# Altium PCB FASTCHARGE.PcbDoc
Units mm, origin at the board's own origin, x right, y up, seen from the top; angles counter-clockwise.
Board outline 48.26 x 26.04 mm, 2 copper layers (Top Layer, Bottom Layer); 18 components, 11 nets, 49 pads, 1 vias.
Unrouted connection lines stored in the file: 18.
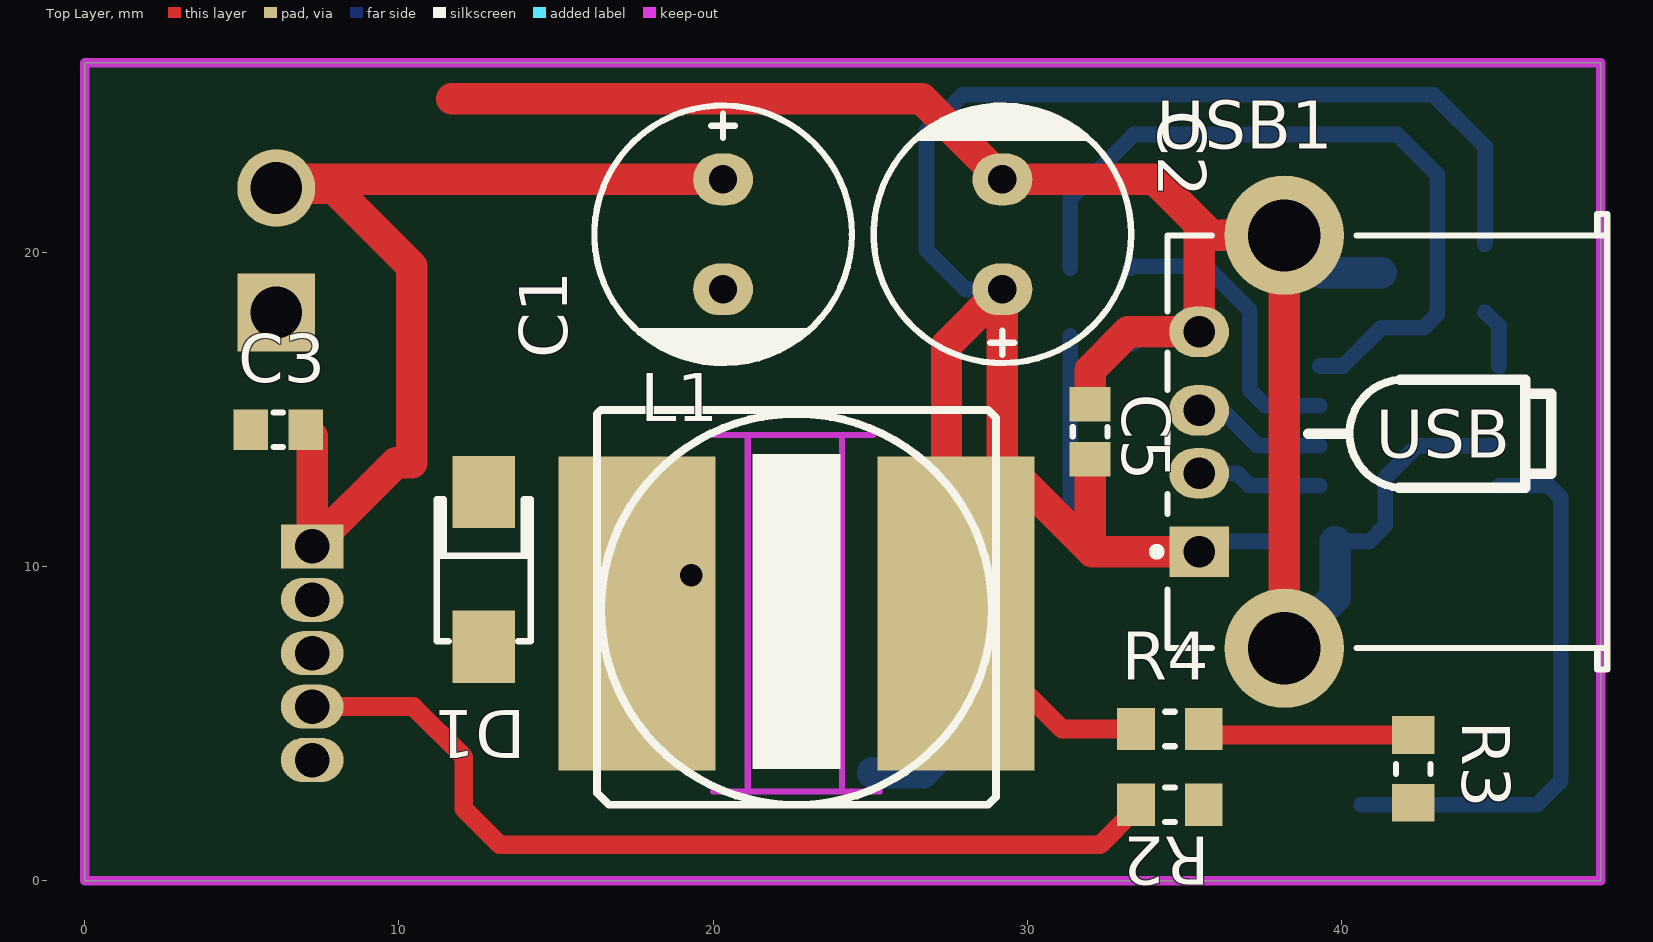
[diagram p0: Top Layer view]
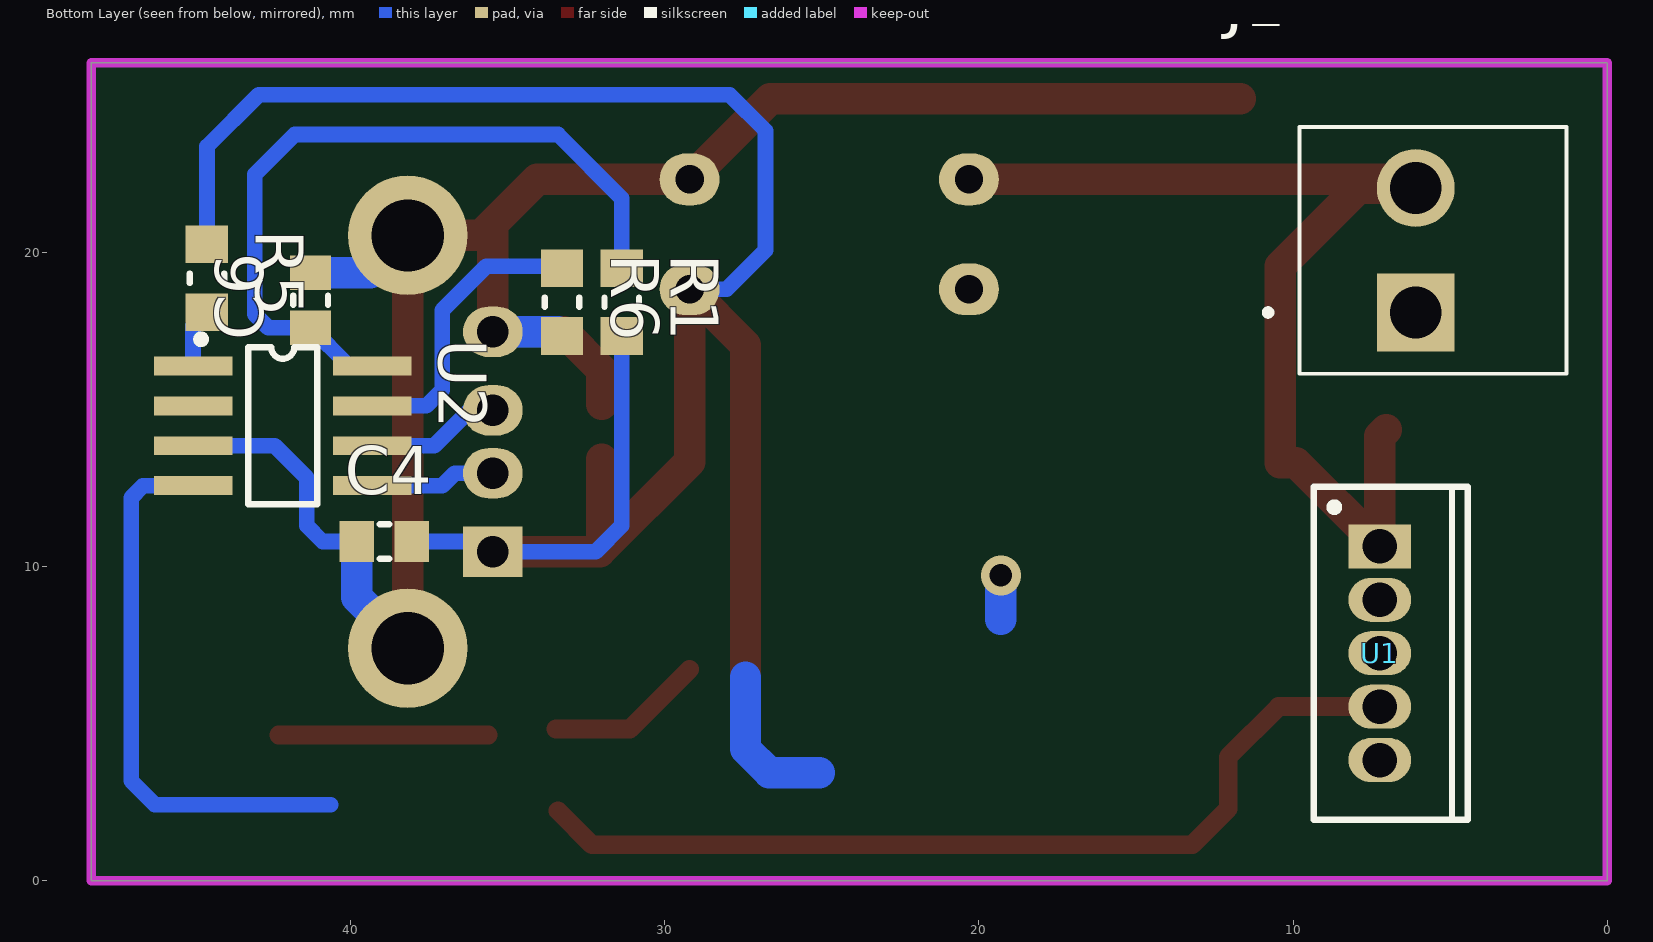
[diagram p1: Bottom Layer view, seen from below]
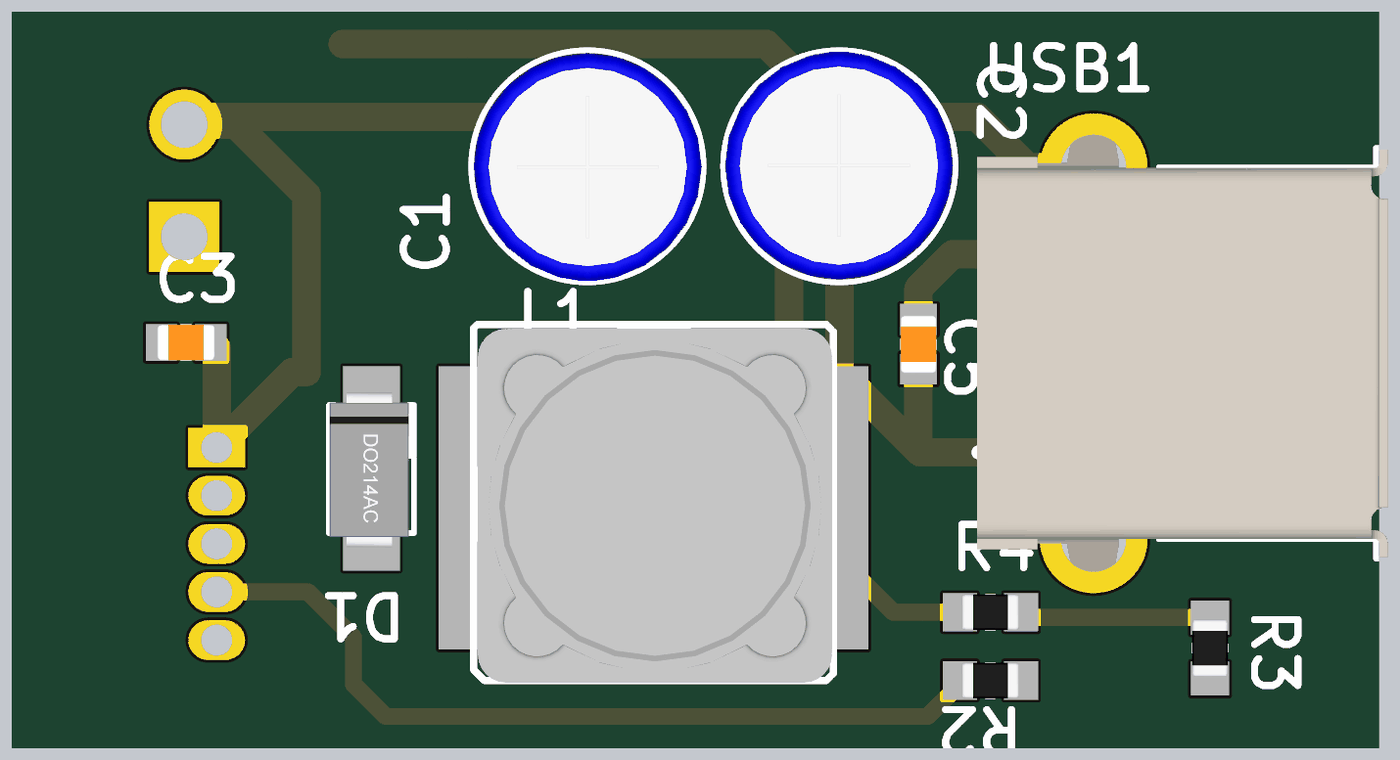
[diagram p2: 3D render of the assembled board from above, using the file's embedded part models]
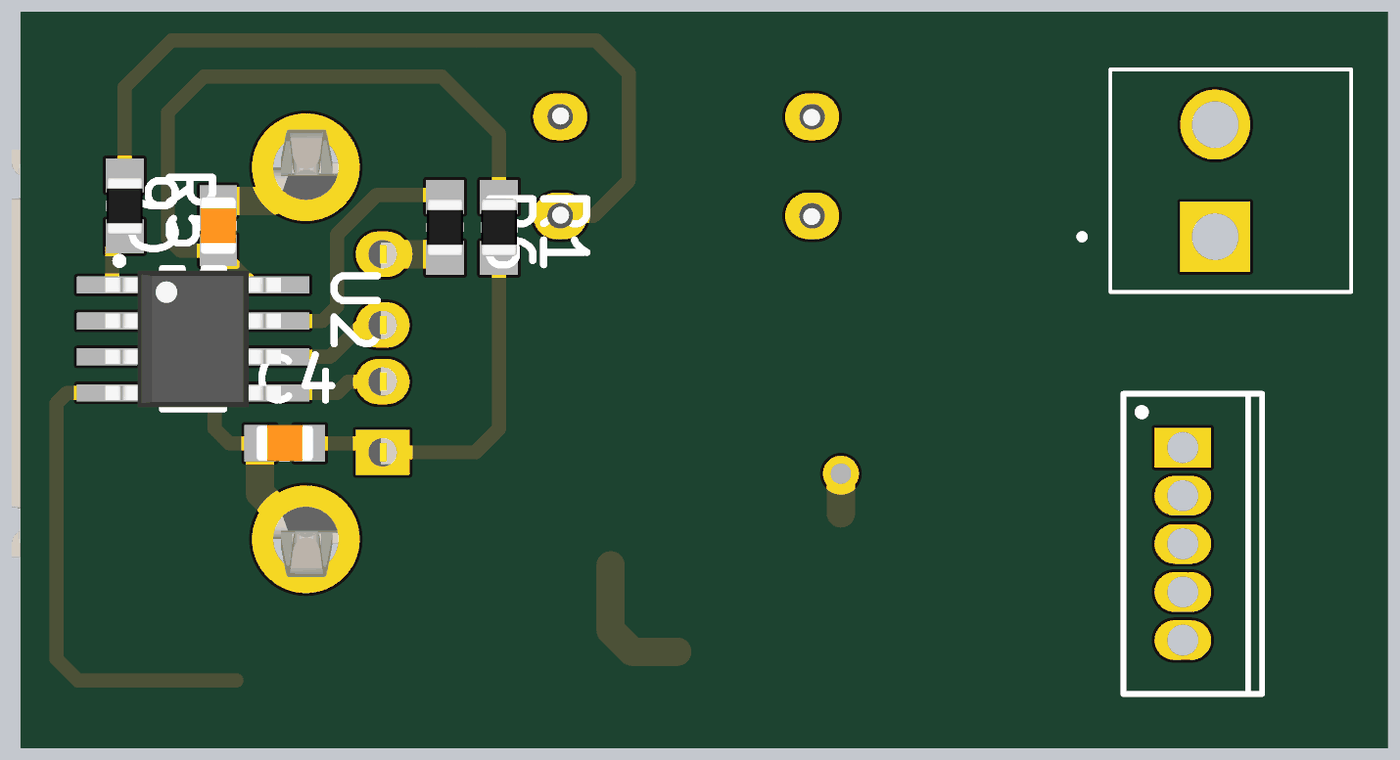
[diagram p3: 3D render of the assembled board from below, using the file's embedded part models]

## Layer stack, top to bottom
Top Solder: solder mask 0.0102, Solder Resist, Dk 3.5
Top Layer: signal copper 0.0356
Dielectric 1: dielectric 0.32, FR-4, Dk 4.8
Bottom Layer: signal copper 0.0356
Bottom Solder: solder mask 0.0102, Solder Resist, Dk 3.5

## Board outline
0,0 48.26,0 48.26,26.035 0,26.035

## Design rules (kind name [scope] priority, off if disabled: settings)
Clearance [All] p1: gap=0.7 ignorepadtopadclearanceinfootprint=FALSE
PlaneConnect [All] p1: planeconnectstyle=Direct reliefexpansion=0.508 reliefentries=4 reliefconductorwidth=0.254 reliefairgap=0.254
PolygonConnect [All] p1: connectstyle=Direct reliefconductorwidth=0.254 reliefentries=4 polygonreliefangle="90 Angle" airgapwidth=0.254
RoomDefinition FastCharge [InComponentClass('FastCharge')] p1: confinementstyle=ConfineIn formatcopy=TRUE lockcomponents=FALSE outline -25.4,-100.965 25.4,-100.965 25.4,-75.565 -25.4,-75.565
RoutingVias [All] p1: holewidth=0.711 width=1.27 viastyle="Through Hole" minholewidth=0.711 minwidth=1.27 maxholewidth=0.711 maxwidth=1.27
SolderMaskExpansion [All] p1: expansion=0.102
Width [All] p1: maxlimit=2.54 minlimit=0.254 preferedwidth=0.508
29 further rules are at their usual default settings.

## Components (designator, comment, footprint, x,y, rotation, side; value= is the part's Value field where it differs from the comment)
C1 "470uF" "Cap 3.5mm" 20.32,20.574 r90 top
C2 "470uF" "Cap 3.5mm" 29.21,20.574 r270 top
C3 "100nF" "SMD 0805" 5.334,14.351 r0 top
C4 "100nF" "SMD 0805" 39.751,10.795 r180 bottom
C5 "100nF" "SMD 0805" 32.004,15.113 r270 top
C6 "100nF" "SMD 0805" 41.275,17.653 r90 bottom
D1 "SS34" "DIODE DO-214AC SMD" 12.7,9.906 r180 top
J1 "6-1123723-2" *TE_6-1123723-2 6.096,20.066 r90 bottom
L1 "33uH" IND_SMD-13.0mm 22.655,8.636 r0 top
R1 "2k2" 0805_1/8W 31.369,18.415 r270 bottom
R2 "33k" 0805_1/8W 34.544,2.413 r0 top
R3 "1k" 0805_1/8W 42.291,3.556 r270 top
R4 "100k" 0805_1/8W 34.544,4.826 r0 top
R5 "2k2" 0805_1/8W 44.577,19.177 r270 bottom
R6 "38k4" 0805_1/8W 33.274,18.415 r270 bottom
U1 "LM2596-ADJ" T05A 7.239,7.239 r270 bottom
U2 "CHY103" "SOIC 8-Lead  (3.8mm)" 42.164,14.478 r180 bottom
USB1 "USB Connector-B Type" USB2.5-2H4C 36.83,13.97 r0 top

## Footprints (in the part's own frame and the unit in brackets; to place one, negate y for a bottom-side part, rotate by r counter-clockwise, add the part's x,y. Pads: shape width x height; smd on the part's side, far side on the other; paste and mask are expansions set on the pad)
0805_1/8W [mm] "Chip Resistor, 2-Leads, Body 2.0x1.3mm, IPC High Density _ (0.100 W)"
  rect 1.2x1.35 smd: 1(-1.079,0) 2(1.079,0)
  silkscreen extent -0.15,-0.55 0.15,0.55, body extent -1.02,-0.64 1.02,0.64, height 0.6
*TE_6-1123723-2 [mm]
  rect 2.475x2.475 hole 1.65: 1(-1.98,0)
  round 2.475 hole 1.65: 2(1.98,0)
  silkscreen extent -3.93,-4.8 3.93,4.8
"Cap 3.5mm" [mm]
  oval 1.651x1.905 hole 0.9: 1(1.75,0) 2(-1.75,0)
  silkscreen extent -4.1,-4.1 4.1,4.1, body extent -4.05,-4.04 4,4.01, height 12.03
"DIODE DO-214AC SMD" [mm]
  rect 2x2.3 smd: 1(0,2.462) 2(0,-2.462)
  silkscreen extent -1.5,-2.34 1.5,2.29, body extent -1.32,-2.69 1.47,2.79, height 2.24
IND_SMD-13.0mm [mm]
  rect 5x10 smd: 1(-5.08,-0.127) 2(5.08,-0.127)
  Top Layer keep-out lines w0.2: -2.65,-5.8 2.65,-5.8 ; -2.6,5.55 2.45,5.55 ; -1.55,-5.8 -1.55,5.55 ; 1.45,-5.75 1.45,5.5
  silkscreen extent -6.35,-6.22 6.35,6.35, body extent -6.2,-6.3 6.3,6.2, height 6.1
"SMD 0805" [mm]
  rect 1.1x1.3 smd: 1(-0.051,0) 2(1.701,0)
  silkscreen extent 0.67,-0.55 0.97,0.55, body extent -0.19,-0.63 1.84,0.63, height 0.65
"SOIC 8-Lead  (3.8mm)" [mm]
  rect 2.5x0.6 smd: 1(-2.854,1.905) 2(-2.854,0.635) 3(-2.854,-0.635) 4(-2.854,-1.905) 5(2.854,-1.905) 6(2.854,-0.635) 7(2.854,0.635) 8(2.854,1.905)
  silkscreen extent -2.72,-2.5 1.1,2.88, body extent -3.1,-2.41 3.1,2.41, height 1.7
T05A [mm] "TO, Thru-Hole, Vertical, Heatsink Mounted; 5 In-Line Leads; Pitch 1.70 mm"
  rect 1.4x2 hole 1.1: 1(-3.4,0)
  oval 1.4x2 hole 1.1: 2(-1.7,0) 3(0,0) 4(1.7,0) 5(3.4,0)
  silkscreen extent -5.3,-2.1 5.3,2.8, body extent -5.35,-2.15 5.35,2.85, height 15.9
USB2.5-2H4C [mm] "Connector; USB1.1, Type A, Thru-Hole; 4 Position; Right Angle"
  rect 1.9x1.6 hole 1: 1(-1.355,-3.5)
  oval 1.9x1.6 hole 1: 2(-1.355,-1) 3(-1.355,1) 4(-1.355,3.5)
  round 3.8 hole 2.3: 5(1.355,6.57) 6(1.355,-6.57)
  silkscreen extent -2.83,-7.25 11.64,7.25, body extent -2.77,-7.9 11.73,7.9, height 7.35

## Part data
C1 C2: library part CAP, ="Cap 7.6mm"
C3 C4 C5 C6: library part "CAP NON", ="Cap non 2.54mm"
D1: library part Diode, ="Diode 2.54mm"
J1: "3.96 EP HDR ASSY 2P_GREEN_", Package=None, Availability=Unavailable, Centerline_Pitch="3.96 mm[.156 in]", EU_RoHS_Compliance=Compliant, MF="TE Connectivity", MP=6-1123723-2, Number_of_Positions=2, Price=None, Product_Type=Header, SnapEDA_Link=https://www.snapeda.com/parts/6-1123723-2/TE%20Connectivity%20AMP%20Connectors/view-part/?ref=snap, TE_purchase_URL=https://www.te.com/usa-en/product-6-1123723-2.html?te_bu=Cor&te_type=disp&te_campaign=seda_glo_cor-seda-global-disp-prtnr-fy19-seda-model-bom-cta_sma-317_1&elqCampaignId=32493
L1: library part Inductor, "Inductor", ="Inductor 26.8mm"
R1 R2 R3 R4 R5 R6: library part RESISTOR, ="Res 0603"
U1: library part MOSFET-N3, "Two-Gate, N-Channel MOSFET, Externally Terminated Substrate", Code_JEDEC=TS-001-AA, LatestRevisionDate=17-Jul-2002, LatestRevisionNote="Re-released for DXP Platform.", PackageDescription="TO-220, Molded, 5 Lead, Straight", PackageReference=T05A, Published=24-Mar-1999, Publisher="Altium Limited"
USB1: ="USB type A"

## Via types
v1: diameter 1.27, hole 0.711, Top Layer to Bottom Layer, 1 vias

## Nets (pads, with @x,y where several pads share a name; then routed paths per layer and width w, separated by ;. In a path a pad name is that pad's centre, name@x,y a point inside that pad or via, vN(x,y) a via of type N, cw(c..) or ccw(c..) an arc to the next point about the centre after c; other vN are vias at no path point)
GND: C1.2 C2.2 C3.1 C4.1 C5.1 C6.2 D1.1 J1.1 R2.2 R6.2 U1.3 U1.5 U2.3 USB1.4 USB1.5 USB1.6 | length 67.2
  Top Layer w1: 11.684,24.892 26.642,24.892 C2.2 34.064,22.324 35.475,20.913 ; C5.1 32.004,16.256 33.218,17.47 USB1.4 35.475,20.913 ; USB1.6 USB1.5 35.848,20.54 35.475,20.913
  Bottom Layer w0.5: C4.1 40.894,10.795 41.402,11.303 41.402,12.827 42.418,13.843 U2.3
  Bottom Layer w1: R6.2 33.408,17.47 USB1.4 ; USB1.6 39.802,9.017 C4.1 ; USB1.5 39.371,19.354 C6.2
NetC1_1: C1.1 C3.2 J1.2 U1.1 | length 14.2
  Top Layer w1: J1.2@6.096,22.324 C1.1
NetC6_1: C6.1 R1.1 U2.8 | length 24.1
  Bottom Layer w0.5: R1.1 31.369,21.717 33.401,23.749 41.783,23.749 43.053,22.479 43.053,18.034 42.621,17.602 C6.1 40.056,16.383 U2.8
NetD1_2: D1.2 L1.1 U1.2
NetR2_1: R2.1 R3.2 U1.4 | length 1.4
  Bottom Layer w1: 19.304,8.318 v1(19.304,9.716)
NetR3_1: R3.1 R4.2 U2.4 | length 17.8
  Bottom Layer w0.5: 40.64,2.413 46.228,2.413 46.99,3.175 46.99,12.192 46.609,12.573 U2.4
NetR5_2: R5.2 U2.1 | length 1.9
  Bottom Layer w0.5: R5.2 45.018,17.657 U2.1
NetR6_1: R6.1 U2.7 | length 9.4
  Bottom Layer w0.5: R6.1 33.338,19.558 35.687,19.558 37.084,18.161 37.084,15.621 37.592,15.113 U2.7
NetU2_5: U2.5 USB1.2 | length 4
  Bottom Layer w0.5: USB1.2 36.687,12.97 37.084,12.573 U2.5
NetU2_6: U2.6 USB1.3 | length 4.3
  Bottom Layer w0.5: USB1.3 36.211,14.97 37.338,13.843 U2.6
VCC: C2.1 C4.2 C5.2 L1.2 R1.2 R4.1 R5.1 USB1.1 | length 75.8
  Top Layer w1: L1.2@27.432,6.477 27.432,17.046 C2.1 29.21,13.335 32.004,10.541 ; C5.2 32.004,10.541 ; USB1.1 32.075,10.47 32.004,10.541
  Bottom Layer w0.5: C2.1 28.039,18.824 26.797,20.066 26.797,23.876 27.94,25.019 42.926,25.019 44.577,23.368 R5.1 ; R1.2 31.369,11.303 32.202,10.47 USB1.1 35.8,10.795 C4.2
  Bottom Layer w1: 25.082,3.429 26.67,3.429 27.432,4.191 27.432,6.477
pads on no net: U2.2
copper on no net: | length 60.8
  Top Layer w0.6: 7.239,5.539 10.463,5.539 12.065,3.937 12.065,2.286 13.208,1.143 32.321,1.143 33.401,2.223 ; 29.21,6.731 31.115,4.826 33.465,4.826 ; 35.623,4.635 42.291,4.635
  Top Layer w1: 6.096,22.046 7.926,22.046 10.414,19.558 10.414,13.306 9.906,13.306 7.239,10.639 7.239,14.147 7.035,14.351

## Keep-outs
Keep-Out Layer:
  the board outline again, w0.3

## Text inside footprints (layer, text, board x,y; h text height)
USB1: Top Overlay "USB" at 41.099,13.462 h1.52